# Altium PCB PCB_Copy of car.SchDoc_4_2023-05-25.pcbdoc
Units mil, origin at the board's own origin, x right, y up, seen from the top; angles counter-clockwise.
Board outline 3780 x 4178.39 mil, 2 copper layers (Top Layer, Bottom Layer); 31 components, 40 nets, 166 pads, 37 vias.
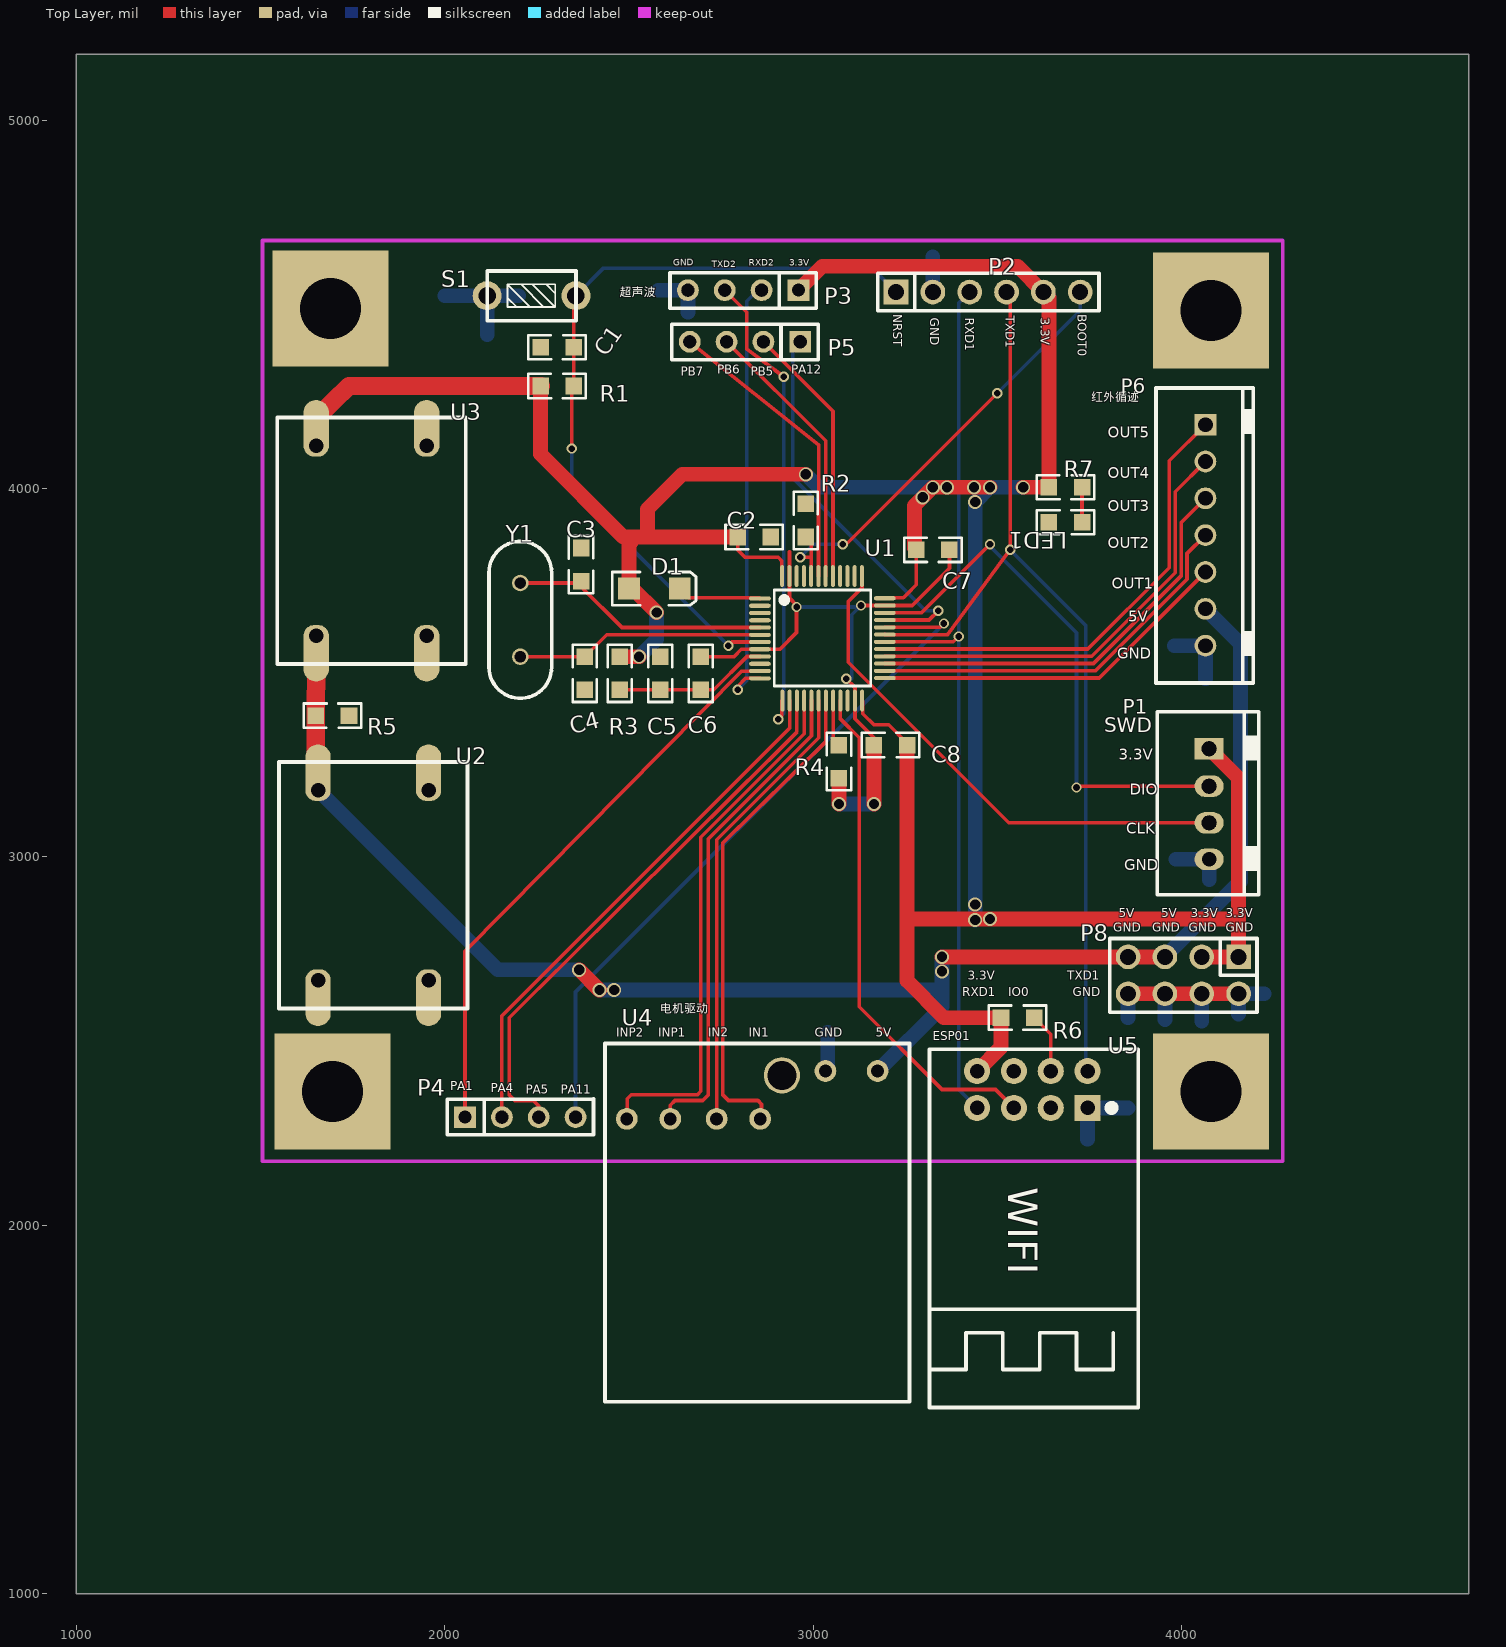
[diagram p0: Top Layer view]
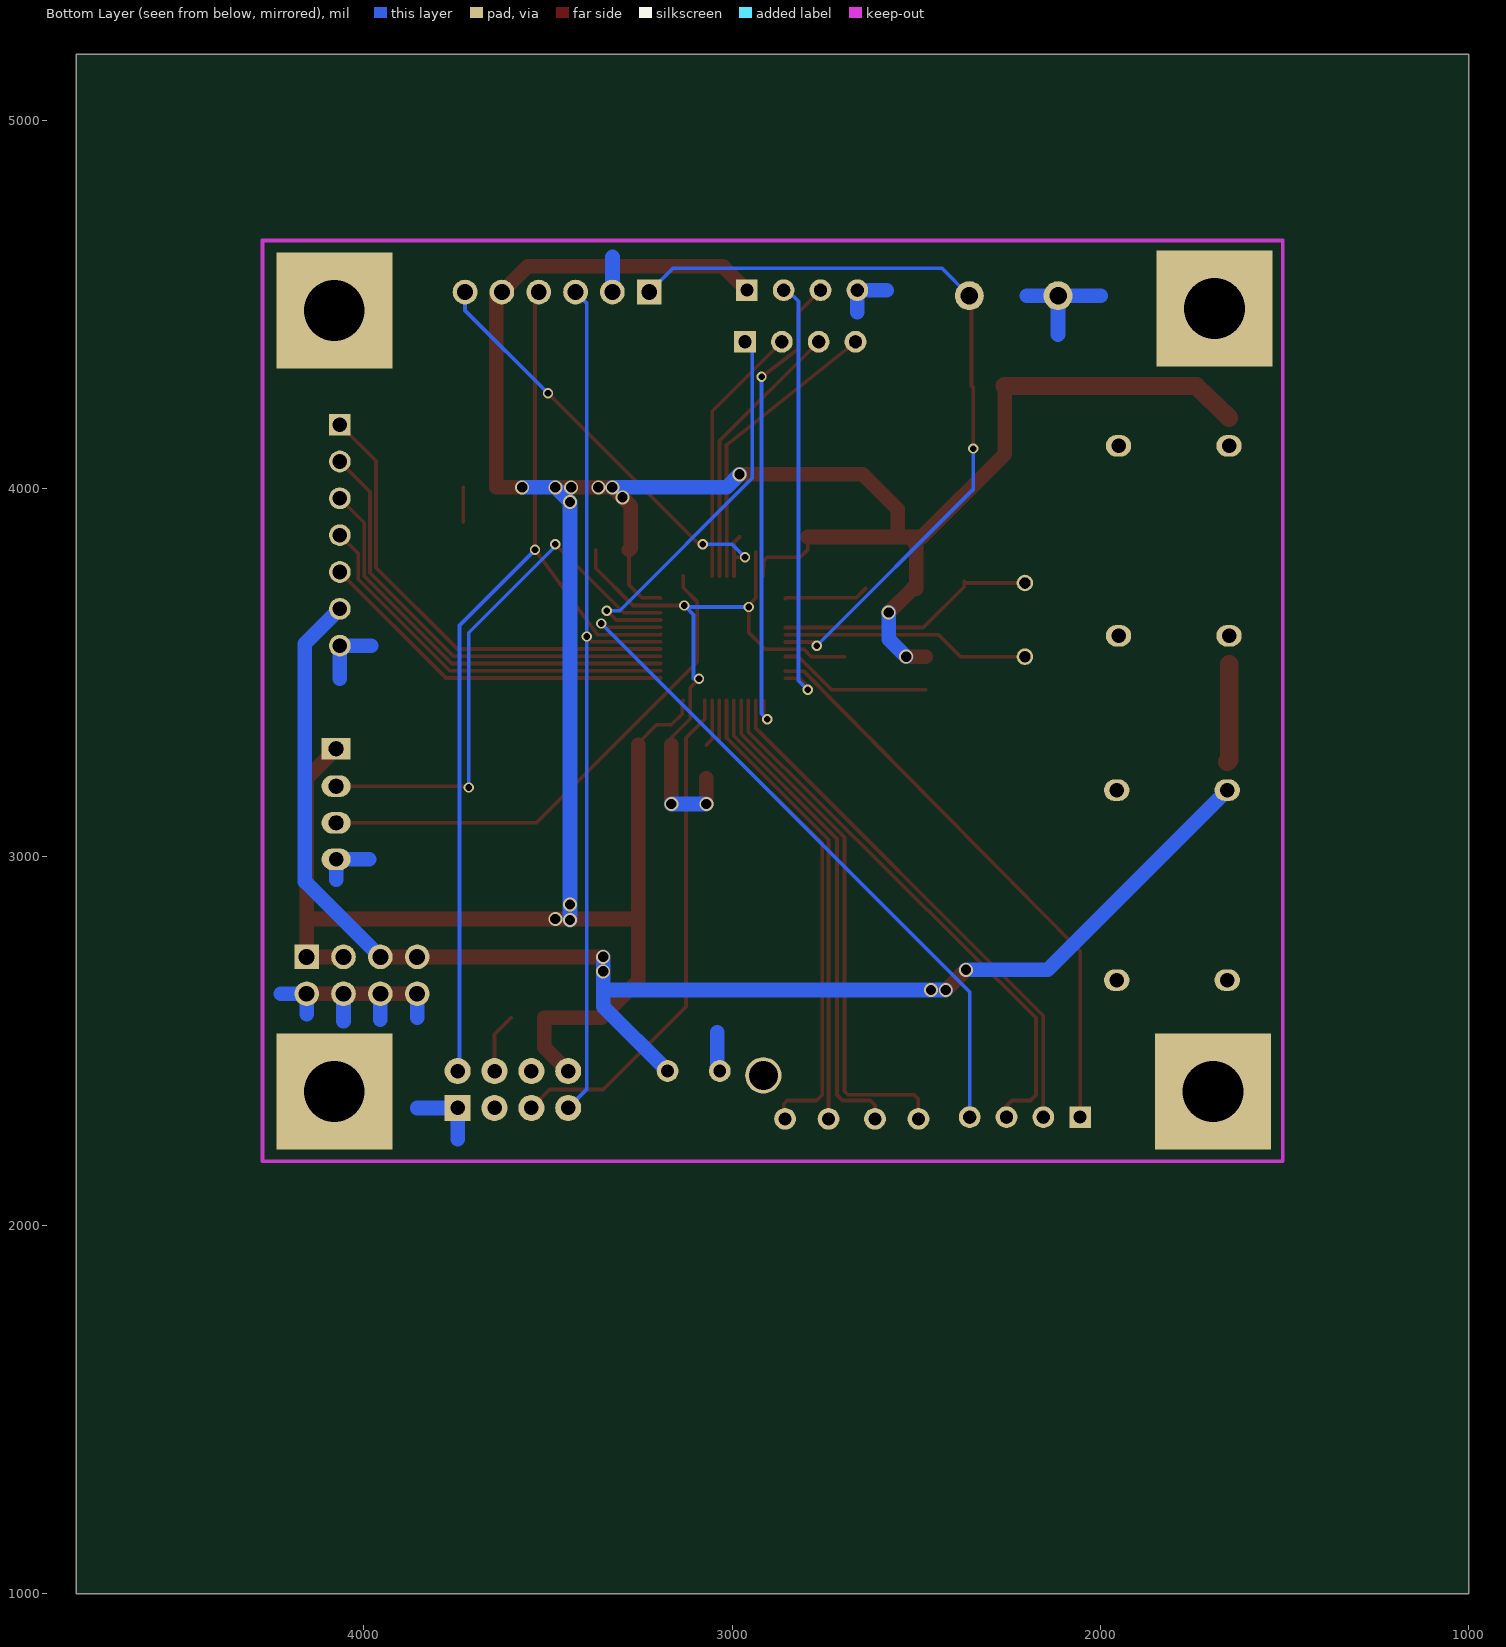
[diagram p1: Bottom Layer view, seen from below]

## Layer stack, top to bottom
Top Layer: signal copper (thickness not stored)
Dielectric: dielectric 12.6, FR-4, Dk 4.8
Bottom Layer: signal copper (thickness not stored)

## Board outline
4780,1000 1000,1000 1000,5178.39 4780,5178.39

## Components (designator, comment, footprint, x,y, rotation, side; value= is the part's Value field where it differs from the comment)
C1 "104" 0805 2260,4383.39 r0 top
C2 "104" 0805 2795,3868.39 r0 top
C3 "22P" 0805 2370,3838.39 r270 top
C4 "22P" 0805 2380,3453.39 r90 top
C5 "10uF" 0805 2585,3453.39 r90 top
C6 "104" 0805 2695,3453.39 r90 top
C7 "104" 0805 3280,3833.39 r0 top
C8 "104" 0805 3255,3303.39 r180 top
D1 "1N4148" "______ __Ƭ IN4148" 2500,3728.39 r0 top
LED1 "FC-2012UGK-520D5" 0805 3730,3908.39 r180 top
P1 "XH2.54-4" VH2.54_4 4075,3293.39 r90 top
P2 "2.54-1*6" HDR-TH_6P-P2.54-V-M 3475,4533.39 r0 top
P3 "2.54 1*4" "___Ų___ 2.54 1*4" 2960,4538.39 r180 top
P4 "2.54 1*4" "___Ų___ 2.54 1*4" 2055,2293.39 r0 top
P5 "2.54 1*4" "___Ų___ 2.54 1*4" 2965,4398.39 r180 top
P6 "XH2.54-7" VH2.54_7 4065,4173.39 r90 top
P8 "PZ254V-12-8P" HDR-TH_8P-P2.54-V-M-R2-C4-S2.54 4005,2678.39 r180 top
R1 "10K" 0805 2260,4278.39 r0 top
R2 "100K" 0805 2980,3958.39 r270 top
R3 "10R" 0805 2475,3543.39 r270 top
R4 "100K" 0805 3070,3213.39 r90 top
R5 "10K" 0805 1740,3383.39 r180 top
R6 "1K" 0805 3510,2563.39 r0 top
R7 "4.7K" 0805 3640,4003.39 r0 top
S1 "key" "____ _ᴥ  6*3" 2115,4523.39 r90 top
U1 "stm32f103c6t6" LQFP-48_48P-L7.0-W7.0-P0.50-LS9.0-BL 3025,3593.39 r270 top
U2 "5V降压模块" MOTOR-DRIVE 1550,2588.39 r90 top
U3 "3.3V降压模块" MOTOR-DRIVE 1545,3523.39 r90 top
U4 "电机驱动" DIRVE_MOTOR 2435,2493.39 r270 top
U5 "2.4GHz" WIFIM-TH_8P-L24.7-W14.4-P2.54 3595,2368.39 r270 top
Y1 "8M" "____ BCY-W2/E4.7" 2205,3543.39 r90 top

## Footprints (in the part's own frame and the unit in brackets; to place one, negate y for a bottom-side part, rotate by r counter-clockwise, add the part's x,y. Pads: shape width x height; smd on the part's side, far side on the other; paste and mask are expansions set on the pad)
0805 [mil]
  rect 45x45 smd paste+0 mask+2: 1(0,0) 2(90,0)
  silkscreen extent -33,-33 123,33
"____ _ᴥ  6*3" [mm]
  round 2 hole 1.2 paste+0 mask+0.051: 1(0,0) 2(0,-6.121)
  silkscreen extent -1.73,-6.12 1.7,0
"____ BCY-W2/E4.7" [mil]
  round 45 hole 30 slot 30.2 at 0 deg paste+0 mask+2: 1(0,0) 2(200,0)
  silkscreen extent -113,-85 313,85
"______ __Ƭ IN4148" [mm]
  rect 1.5x1.5 smd paste+0 mask+0.051: 1(0,0) 2(3.5,0)
  silkscreen extent -1.15,-1.15 4.62,1.15
"___Ų___ 2.54 1*4" [mm]
  rect 1.5x1.5 hole 0.9 paste+0 mask+0.051: 1(0,0)
  round 1.5 hole 0.889 slot 0.894 at 90 deg paste+0 mask+0.051: 2(2.54,0) 3(5.08,0) 4(7.62,0)
  silkscreen extent -1.23,-1.21 8.85,1.25
DIRVE_MOTOR [mm]
  round 1.5 hole 0.889 paste+0 mask+0.051: 1(1.9,18.8) 2(1.9,15.2) 3(5.2,10.7) 4(5.2,7.7) 5(5.2,4.5) 6(5.2,1.5)
  round 2.5 hole 2 paste+0 mask+0.051: ""(2.2,12.2)
  silkscreen extent 0,0 24.7,21
HDR-TH_6P-P2.54-V-M [mm]
  rect 1.7x1.7 hole 1.1 paste+0 mask+0.051: 1(-6.35,0)
  round 1.7 hole 1.1 paste+0 mask+0.051: 2(-3.81,0) 3(-1.27,0) 4(1.27,0) 5(3.81,0) 6(6.35,0)
  silkscreen extent -7.6,-1.3 7.65,1.3
HDR-TH_8P-P2.54-V-M-R2-C4-S2.54 [mm]
  rect 1.7x1.7 hole 1.1 paste+0 mask+0.051: 1(-3.81,-1.27)
  round 1.7 hole 1.1 paste+0 mask+0.051: 2(-3.81,1.27) 3(-1.27,-1.27) 4(-1.27,1.27) 5(1.27,-1.27) 6(1.27,1.27) 7(3.81,-1.27) 8(3.81,1.27)
  silkscreen extent -5.08,-2.54 5.08,2.54
LQFP-48_48P-L7.0-W7.0-P0.50-LS9.0-BL [mm]
  oval 0.28x1.5 smd paste+0 mask+0.051: 1(-2.743,-4.305) 2(-2.243,-4.305) 3(-1.742,-4.305) 4(-1.242,-4.305) 5(-0.742,-4.305) 6(-0.241,-4.305) 7(0.257,-4.305) 8(0.757,-4.305) 9(1.257,-4.305) 10(1.758,-4.305) 11(2.258,-4.305) 12(2.758,-4.305) 25(2.743,4.305) 26(2.243,4.305) 27(1.742,4.305) 28(1.242,4.305) 29(0.742,4.305) 30(0.241,4.305) 31(-0.257,4.305) 32(-0.757,4.305) 33(-1.257,4.305) 34(-1.758,4.305) 35(-2.258,4.305) 36(-2.758,4.305)
  oval 1.5x0.28 smd paste+0 mask+0.051: 13(4.293,-2.756) 14(4.293,-2.256) 15(4.293,-1.755) 16(4.293,-1.255) 17(4.293,-0.754) 18(4.293,-0.254) 19(4.293,0.244) 20(4.293,0.744) 21(4.293,1.245) 22(4.293,1.745) 23(4.293,2.245) 24(4.293,2.746) 37(-4.293,2.73) 38(-4.293,2.23) 39(-4.293,1.73) 40(-4.293,1.229) 41(-4.293,0.729) 42(-4.293,0.229) 43(-4.293,-0.269) 44(-4.293,-0.77) 45(-4.293,-1.27) 46(-4.293,-1.77) 47(-4.293,-2.271) 48(-4.293,-2.771)
  silkscreen extent -3.33,-3.31 3.3,3.34
MOTOR-DRIVE [mm]
  oval 2.42x1.75 smd paste+0: 1(0,-2.69) 2(0,-10.31) 3(17,-10.31) 4(17,-2.69)
  rect 1.95x1.75 smd paste+0: 1(0.975,-2.69) 2(0.975,-10.31) 3(16.025,-10.31) 4(16.025,-2.69)
  oval 1.5x1.75 hole 1 paste+0: 1(1.95,-2.69) 2(1.95,-10.31) 3(15.05,-10.31) 4(15.05,-2.69)
  silkscreen extent 0,-13 17,0
VH2.54_4 [mm]
  rect 1.5x2 hole 1.016 slot 1.021 at 90 deg paste+0 mask+0.051: 1(0,0)
  oval 1.5x2 hole 1.016 slot 1.021 at 90 deg paste+0 mask+0.051: 2(-2.58,0) 3(-5.105,0)
  oval 1.5x2 hole 1 paste+0 mask+0.051: 4(-7.62,0)
  silkscreen extent -10.06,-3.43 2.56,3.58
VH2.54_7 [mm]
  rect 1.5x1.5 hole 1.016 paste+0 mask+0.051: 1(0,0)
  round 1.5 hole 1.016 paste+0 mask+0.051: 2(-2.54,0) 3(-5.08,0) 4(-7.62,0) 5(-10.16,0) 6(-12.7,0) 7(-15.24,0)
  silkscreen extent -17.82,-3.3 2.53,3.4
WIFIM-TH_8P-L24.7-W14.4-P2.54 [mm]
  rect 1.8x1.8 hole 1 paste+0 mask+0.051: 1(1.27,3.81)
  round 1.8 hole 1 paste+0 mask+0.051: 2(1.27,1.27) 3(1.27,-1.27) 4(1.27,-3.81) 5(-1.27,3.81) 6(-1.27,1.27) 7(-1.27,-1.27) 8(-1.27,-3.81)
  silkscreen extent -2.77,-7.11 21.93,7.31

## Free pads (board coordinates)
  rect 314.96x314.96 hole 165.35 paste+0 mask+2: 0(1690,4488.39) 0(1695,2363.39) 0(4080,2363.39) 0(4080,4483.39)

## Via types
v1: diameter 38, hole 28, Top Layer to Bottom Layer, tented both sides, 20 vias
v2: diameter 28, hole 18, Top Layer to Bottom Layer, tented both sides, 17 vias

## Nets (pads, with @x,y where several pads share a name; then routed paths per layer and width w, separated by ;. In a path a pad name is that pad's centre, name@x,y a point inside that pad or via, vN(x,y) a via of type N, cw(c..) or ccw(c..) an arc to the next point about the centre after c; other vN are vias at no path point)
0: pad.0@1690,4488.39
1: pad.0@4080,4483.39
2: pad.0@4080,2363.39
3.3V: C2.1 C7.1 C8.1 D1.1 P1.1 P2.5 P3.1 P8.1 P8.3 R1.1 R3.1 R6.1 R7.1 U1.24 U1.36 U1.48 U3.4 U5.8 | length 9182.6
  Top Layer w10: C2.1 2795,3833.39 2815,3813.39 2905,3813.39 2915,3803.39 U1.48 ; U1.24 3135,3422.49 3135,3388.39 3165,3358.39 3205,3358.39 3255,3308.38 C8.1 ; U1.36 3195.9,3703.39 3245,3703.39 3255.2,3713.59 3280,3738.39 C7.1
  Top Layer w40: R1.1 2260,4093.39 2485,3868.39 2550,3868.39 ; R3.1 v1(2527.4,3543.39) ; 2505.4,3868.39 2505.4,3853.79 2500,3848.39 D1.1 2510,3728.39 v1(2575,3663.39) ; C2.1 2550,3868.39 ; P3.1 3025,4603.39 3555,4603.39 P2.5 3640,4518.39 R7.1 v1(3570,4003.39) ; v1(2980,4038.39) 2645,4038.39 2550,3943.39 2550,3868.39 ; 3255,2831.33 v1(3480.02,2831.33) 4151.3,2831.33 4155,2835.03 ; C8.1 3255,2663.39 3355,2563.39 R6.1 3510,2483.38 U5.8 ; v1(3480,4003.39) v1(3436.76,4003.39) v1(3363.29,4003.39) v1(3325,4003.39) v1(3297.53,3975.92) 3275,3953.39 ; P8.3 P8.1 4155,3213.39 P1.1 ; C7.1@3275,3838.38 C7.1 C7.1@3275,3838.39 ; C7.1@3275,3838.38 3275,3953.39 ; C7.1@3275,3838.39 3275,3953.39
  Top Layer w50: U3.4@1651,4192.39 1740,4278.39 1765,4278.39 R1.1
  Bottom Layer w40: v1(2527.4,3543.39) 2575,3590.99 v1(2575,3663.39) ; v1(2980,4038.39) 3015,4003.39 v1(3325,4003.39) ; v1(3440,2828.39) v1(3440,2870.48) v1(3440,3963.39) v1(3480,4003.39) v1(3570,4003.39)
4: pad.0@1695,2363.39
5V: P6.6 P8.5 P8.7 R5.2 U2.4 U3.1 U4.1 | length 4247
  Top Layer w40: v1(2365,2693.39) v1(2420,2638.39) ; v1(3350,2728.39) P8.7 P8.5
  Top Layer w50: U3.1@1650.9,3523.39 R5.2 1650,3263.59 U2.4@1655.91,3257.68
  Bottom Layer w40: U2.4@1655.91,3180.91 2143.43,2693.39 v1(2365,2693.39) ; v1(2420,2638.39) v1(2460,2638.39) 3341.36,2638.39 3350,2647.03 ; U4.1 3350,2593.43 v1(3350,2689.15) v1(3350,2728.39) ; P8.5 4160,2933.39 4160,3578.39 P6.6
BOOT0: P2.6 R2.2 U1.44 | length 1230.4
  Top Layer w10: v2(2965,3813.39) 2992.05,3813.39 2994.7,3816.03 ; R2.2 2994.7,3853.69 U1.44 ; v2(3080,3848.39) 3090,3848.39 v2(3500,4258.39)
  Bottom Layer w10: v2(2965,3813.39) 3000,3848.39 v2(3080,3848.39) ; v2(3500,4258.39) 3725,4483.39 P2.6
ESP_IO0: U1.21 U5.3 | length 1386
  Top Layer w10: U1.21 3074,3374.39 3125,3323.39 3125,2593.39 3350,2368.39 3495,2368.39 U5.3
GND: C1.1 C2.2 C3.1 C4.1 C5.2 C6.2 C7.2 C8.2 LED1.2 P1.4 P2.2 P3.4 P6.7 P8.2 P8.4 P8.6 P8.8 R2.1 R4.1 R5.1 S1.1 U1.8 U1.23 U1.35 U1.47 U2.2 U2.3 U3.2 U3.3 U4.2 U5.1 | length 3581
  Top Layer w10: C6.2 2785,3543.39 2805,3563.39 U1.8@2855.5,3563.39 ; U1.8 2909.8,3563.59 2955,3608.79 2955,3683.39 2935.6,3702.79 U1.47 2935.6,3828.39 ; v2(3090,3483.39) 3113.4,3459.99 U1.23 3113.4,3374.99 3165,3323.38 C8.2 ; v2(3130,3682.29) U1.35 3268.9,3682.29 3370,3783.38 C7.2
  Top Layer w40: v1(3070,3143.39) R4.1 ; v1(3165,3143.39) C8.2 ; P8.8 P8.6 P8.4 P8.2
  Bottom Layer w10: v2(2955,3678.39) 3126.1,3678.39 v2(3130,3682.29) 3105,3657.29 3105,3483.39 v2(3090,3483.39)
  Bottom Layer w40: 2000,4523.39 S1.1 ; 2115,4418.39 S1.1 ; 2200,4523.39 S1.1 ; 2580,4538.39 P3.4 2660,4478.39 ; U4.2 3040,2425.17 3040,2523.39 ; v1(3070,3143.39) v1(3165,3143.39) ; P2.2 3325,4628.39 ; 3745,2233.39 U5.1 3855,2318.39 ; 3855,2563.39 P8.8 ; 3955,2558.39 P8.6 ; 3980,3573.39 P6.7 4065,3483.39 ; 3985,2993.39 P1.4 4075,2938.39 ; 4055,2553.39 P8.4 ; 4155,2573.39 P8.2 4225,2628.39
IN1: U1.19 U4.3 | length 1353.8
  Top Layer w10: U4.3@2850,2294.93 U4.3 2860,2292.41 2860,2328.39 2850,2338.39 2770,2338.39 2755,2353.39 2755,3038.39 3034.6,3312.99 U1.19
IN2: U1.18 U4.4 | length 1250.4
  Top Layer w10: U4.4@2738.15,2288.67 2738.15,3046.54 3015,3323.39 U1.18
INP3: U1.17 U4.5 | length 1338.4
  Top Layer w10: U4.5 2612.16,2325.55 2625,2338.39 2700,2338.39 2715,2353.39 2715,3048.39 2995.3,3328.69 U1.17
INP4: U1.16 U4.6 | length 1440.2
  Top Layer w10: U4.6@2494,2288.69 2495,2343.39 2506.1,2354.49 2686.1,2354.49 2695,2363.39 2695,3053.39 2975.6,3333.99 U1.16
LED1_1: LED1.1 R7.2 | length 95
  Top Layer w10: LED1.1 R7.2
NRST: C1.2 P2.1 R1.2 S1.2 U1.7 | length 2147.2
  Top Layer w10: v2(2345,4108.39) 2345,4273.39 R1.2 C1.2 2350,4517.39 S1.2 ; v2(2770,3573.39) 2779.9,3583.29 U1.7
  Bottom Layer w10: v2(2345,4108.39) 2345,3998.39 v2(2770,3573.39) ; S1.2 2431,4598.39 3160,4598.39 P2.1
OUT1: P6.5 U1.25 | length 989.8
  Top Layer w10: U1.25 3777,3485.39 P6.5
OUT2: P6.4 U1.26 | length 1064.1
  Top Layer w10: U1.26 3766.7,3505.09 4015,3753.39 4015,3823.39 P6.4
OUT3: P6.3 U1.27 | length 1141.3
  Top Layer w10: U1.27 3761.4,3524.79 3998.93,3762.32 3998.93,3907.32 P6.3
OUT4: P6.2 U1.28 | length 1218.5
  Top Layer w10: U1.28 3756.1,3544.49 3982.86,3771.25 3982.86,3991.25 P6.2
OUT5: P6.1 U1.29 | length 1292.7
  Top Layer w10: U1.29 3745.8,3564.19 3966.79,3785.18 3966.79,4075.18 P6.1
PA1: P4.1 U1.11 | length 1568.3
  Top Layer w10: P4.1 2055,2743.39 2805,3503.39 U1.11
PA4: P4.2 U1.14 | length 1454.6
  Top Layer w10: P4.2 2155,2568.39 2936.2,3349.59 U1.14
PA5: P4.3 U1.15 | length 1518.4
  Top Layer w10: P4.3 2255,2323.39 2240,2338.39 2190,2338.39 2175,2353.39 2175,2563.39 2955.9,3339.29 U1.15
PA11: P4.4 U1.32 | length 1918.9
  Top Layer w10: U1.32 3344.8,3623.19 v2(3355,3633.39)
  Bottom Layer w10: P4.4 2355,2633.39 v2(3355,3633.39)
PA12: P5.1 U1.33 | length 1090.2
  Top Layer w10: U1.33 3314.5,3642.89 v2(3340,3668.39)
  Bottom Layer w10: P5.1 2945,4398.39 2945,4028.39 3305,3668.39 v2(3340,3668.39)
PB5: P5.2 U1.41 | length 714.2
  Top Layer w10: P5.2 3053.7,4209.69 U1.41
PB6: P5.3 U1.42 | length 747.4
  Top Layer w10: P5.3 3034,4129.39 U1.42
PB7: P5.4 U1.43 | length 804.2
  Top Layer w10: P5.4 3015,4118.39 U1.43
SWCLK: P1.3 U1.37 | length 1410.1
  Top Layer w10: U1.37 3132.5,3730.89 3095,3693.39 3095,3528.39 3531,3092.39 P1.3
SWDIO: P1.2 U1.34 | length 1481.2
  Top Layer w10: U1.34 3294.2,3662.59 v2(3480,3848.39) ; v2(3715,3188.39) 3718.43,3191.82 P1.2
  Bottom Layer w10: v2(3480,3848.39) 3480,3843.39 3715,3608.39 v2(3715,3188.39)
U1_1: D1.2 U1.1 | length 228.9
  Top Layer w10: D1.2 2662.8,3703.39 2853.5,3703.39 U1.1
U1_5: C3.2 U1.5 Y1.2 | length 713.5
  Top Layer w10: Y1.2 2365,3743.39 C3.2 2370,3733.39 2480.8,3622.59 U1.5
U1_6: C4.2 U1.6 Y1.1 | length 675.1
  Top Layer w10: Y1.1 C4.2 2439.5,3602.89 U1.6
U1_9: C5.1 C6.1 R3.2 U1.9 | length 418
  Top Layer w10: R3.2 C5.1 C6.1 2730,3453.38 2820.5,3543.89 U1.9
U1_20: R4.2 U1.20 | length 127.5
  Top Layer w10: U1.20 3054.3,3319.08 R4.2
U1_RXD: P2.3 U1.30 U5.4 | length 2454.6
  Top Layer w10: U1.30 3380.5,3583.89 v2(3395,3598.39)
  Bottom Layer w10: P2.3 3395,4503.39 v2(3395,3598.39) 3395,2368.39 U5.4
U1_TXD: P2.4 U1.31 U5.5 | length 2665.6
  Top Layer w10: U1.31 3365,3603.39 v2(3535,3833.39) 3535,4523.39 P2.4
  Bottom Layer w10: v2(3535,3833.39) 3740,3628.39 3740,2418.39 U5.5
U2_RXD: P3.2 U1.12 | length 1197.1
  Top Layer w10: v2(2795,3453.39) 2795,3463.39 2816.4,3484.79 U1.12
  Bottom Layer w10: v2(2795,3453.39) 2820,3478.39 2820,4508.39 2850,4538.39 P3.2
U2_TXD: P3.3 U1.13 | length 1301.8
  Top Layer w10: P3.3 2820,4478.39 2820,4378.39 v2(2920,4303.39) ; v2(2905,3373.39) 2915,3383.39 2915,3422.89 U1.13
  Bottom Layer w10: v2(2905,3373.39) 2920,3388.39 v2(2920,4303.39)
U5_6: R6.2 U5.6 | length 163.6
  Top Layer w10: R6.2 3645,2518.38 U5.6
pads on no net: U1.2 U1.3 U1.4 U1.10 U1.22 U1.38 U1.39 U1.40 U1.45 U1.46 U2.1 U4. U5.2 U5.7

## Polygon pours and split planes (outlines as drawn)
GND on Bottom Layer (solid): 1505,4673.39 1505,2173.39 4275,2173.39 4275,4673.39
GND on Top Layer (solid): 4275,4673.39 4275,2173.39 1505,2173.39 1505,4673.39

## Other copper
Top Layer:
  pour cut-out net U1_6: 2155,3793.39 2155,3488.39 2250,3488.39 2255,3488.39 2255,3493.39 2255,3793.39
  pour cut-out net U1_6: 2070,4453.39 2050,4453.39 2050,4468.39 2050,4593.39 2170,4593.39 2170,4453.39 2070,4453.39
  pour cut-out net U1_6: 2320,4453.39 2300,4453.39 2300,4468.39 2300,4593.39 2420,4593.39 2420,4453.39 2320,4453.39
  pour cut-out net U1_6: 2640,4348.39 2620,4348.39 2620,4363.39 2620,4443.39 3015,4443.39 3015,4348.39 2640,4348.39
  pour cut-out net U1_6: 2625,4493.39 2605,4493.39 2605,4508.39 2605,4588.39 3005,4588.39 3005,4493.39 2625,4493.39
  pour cut-out net U1_6: 3195.93,4482.25 3175.93,4482.25 3175.93,4497.25 3175,4583.39 3775,4583.39 3775,4483.39 3195.93,4482.25
  pour cut-out net U1_6: 4025,3528.39 4005,3528.39 4005,3543.39 4000,4223.39 4130,4223.39 4125,3528.39 4025,3528.39
  pour cut-out net U1_6: 4035,2943.39 4015,2943.39 4015,2958.39 4010,3348.39 4135,3348.39 4135,2943.39 4035,2943.39
  pour cut-out net U1_6: 3825,2578.39 3805,2578.39 3805,2593.39 3805,2773.39 4205,2773.39 4205,2578.39 3825,2578.39
  pour cut-out net U1_6: 3390,2248.39 3370,2248.39 3370,2263.39 3365,2473.39 3820,2478.39 3820,2248.39 3390,2248.39
  pour cut-out net U1_6: 2455,2218.39 2435,2218.39 2435,2233.39 2435,2488.39 3260,2493.39 3260,2213.39 2455,2218.39
  pour cut-out net U1_6: 2027.19,2247.29 2007.19,2247.29 2007.19,2262.29 2005,2338.39 2400,2338.39 2405,2248.39 2027.19,2247.29
  pour cut-out net U1_6: 2867.5,3783.39 2867.5,3398.39 3247.5,3393.39 3252.5,3393.39 3252.5,3398.39 3262.5,3783.39
Bottom Layer:
  pour cut-out net U1_6: 2830,3723.39 2830,3418.39 2925,3418.39 2930,3418.39 2930,3423.39 2930,3723.39
  pour cut-out net U1_6: 2304.75,4048.63 2304.75,3743.63 2399.75,3743.63 2404.75,3743.63 2404.75,3748.63 2404.75,4048.63
  pour cut-out net U1_6: 2155,3793.39 2155,3488.39 2250,3488.39 2255,3488.39 2255,3493.39 2255,3793.39
  pour cut-out net U1_6: 2155,3793.39 2155,3488.39 2250,3488.39 2255,3488.39 2255,3493.39 2255,3793.39
  pour cut-out net U1_6: 2070,4453.39 2050,4453.39 2050,4468.39 2050,4593.39 2170,4593.39 2170,4453.39 2070,4453.39
  pour cut-out net U1_6: 2320,4453.39 2300,4453.39 2300,4468.39 2300,4593.39 2420,4593.39 2420,4453.39 2320,4453.39
  pour cut-out net U1_6: 2640,4348.39 2620,4348.39 2620,4363.39 2620,4443.39 3015,4443.39 3015,4348.39 2640,4348.39
  pour cut-out net U1_6: 2630,4488.39 2610,4488.39 2610,4503.39 2610,4583.39 3010,4583.39 3010,4488.39 2630,4488.39
  pour cut-out net U1_6: 3195.93,4482.25 3175.93,4482.25 3175.93,4497.25 3175,4583.39 3775,4583.39 3775,4483.39 3195.93,4482.25
  pour cut-out net U1_6: 4025,3528.39 4005,3528.39 4005,3543.39 4000,4223.39 4130,4223.39 4125,3528.39 4025,3528.39
  pour cut-out net U1_6: 4035,2943.39 4015,2943.39 4015,2958.39 4010,3348.39 4135,3348.39 4135,2943.39 4035,2943.39
  pour cut-out net U1_6: 3825,2578.39 3805,2578.39 3805,2593.39 3805,2773.39 4205,2773.39 4205,2578.39 3825,2578.39
  pour cut-out net U1_6: 3390,2248.39 3370,2248.39 3370,2263.39 3365,2473.39 3820,2478.39 3820,2248.39 3390,2248.39
  pour cut-out net U1_6: 2455,2218.39 2435,2218.39 2435,2233.39 2435,2488.39 3260,2493.39 3260,2213.39 2455,2218.39
  pour cut-out net U1_6: 2027.19,2247.29 2007.19,2247.29 2007.19,2262.29 2005,2338.39 2400,2338.39 2405,2248.39 2027.19,2247.29
  pour cut-out net U1_6: 2027.19,2247.29 2007.19,2247.29 2007.19,2262.29 2005,2338.39 2400,2338.39 2405,2248.39 2027.19,2247.29
  pour cut-out net U1_6: 2455,2218.39 2435,2218.39 2435,2233.39 2435,2488.39 3260,2493.39 3260,2213.39 2455,2218.39
  pour cut-out net U1_6: 3390,2248.39 3370,2248.39 3370,2263.39 3365,2473.39 3820,2478.39 3820,2248.39 3390,2248.39
  pour cut-out net U1_6: 3825,2578.39 3805,2578.39 3805,2593.39 3805,2773.39 4205,2773.39 4205,2578.39 3825,2578.39
  pour cut-out net U1_6: 4035,2943.39 4015,2943.39 4015,2958.39 4010,3348.39 4135,3348.39 4135,2943.39 4035,2943.39
  pour cut-out net U1_6: 4025,3528.39 4005,3528.39 4005,3543.39 4000,4223.39 4130,4223.39 4125,3528.39 4025,3528.39
  pour cut-out net U1_6: 3195.93,4482.25 3175.93,4482.25 3175.93,4497.25 3175,4583.39 3775,4583.39 3775,4483.39 3195.93,4482.25
  pour cut-out net U1_6: 2640,4348.39 2620,4348.39 2620,4363.39 2620,4443.39 3015,4443.39 3015,4348.39 2640,4348.39
  pour cut-out net U1_6: 2630,4488.39 2610,4488.39 2610,4503.39 2610,4583.39 3010,4583.39 3010,4488.39 2630,4488.39
  pour cut-out net U1_6: 2320,4453.39 2300,4453.39 2300,4468.39 2300,4593.39 2420,4593.39 2420,4453.39 2320,4453.39
  pour cut-out net U1_6: 2070,4453.39 2050,4453.39 2050,4468.39 2050,4593.39 2170,4593.39 2170,4453.39 2070,4453.39
  pour cut-out net U1_6: 2155,3793.39 2155,3488.39 2250,3488.39 2255,3488.39 2255,3493.39 2255,3793.39

## Silkscreen, mask and mechanical layers (free items; w line width, h text height)
Top Overlay:
  text "GND" at 2620,4598.39 h30 r1
  text "RXD2" at 2825,4598.39 h30
  text "3.3V" at 2935,4598.39 h30
  text "TXD2" at 2725,4593.39 h30
  text "超声波" at 2475,4513.39 h40
  text "NRST" at 3210,4473.39 h40 r270
  text "BOOT0" at 3710,4473.39 h40 r270
  text "TXD1" at 3515,4468.39 h40 r270
  text "GND" at 3310,4463.39 h40 r270
  text "RXD1" at 3405,4463.39 h40 r270
  text "3.3V" at 3610,4463.39 h40 r270
  text "PB6" at 2740,4303.39 h40
  text "PA12" at 2940,4303.39 h40
  text "PB7" at 2640,4298.39 h40
  text "PB5" at 2830,4298.39 h40
  text "红外循迹" at 3755,4228.39 h40
  text "OUT5" at 3800,4138.39 h30
  text "OUT4" at 3800,4028.39 h30
  text "OUT3" at 3800,3938.39 h30
  text "OUT2" at 3800,3838.39 h30
  text "OUT1" at 3810,3728.39 h30
  text "5V" at 3855,3638.39 h30
  text "GND" at 3825,3538.39 h30
  text "SWD" at 3790,3338.39 h40
  text "3.3V" at 3830,3263.39 h30
  text "DIO" at 3860,3168.39 h30
  text "CLK" at 3850,3063.39 h30
  text "GND" at 3845,2963.39 h30
  text "5V" at 3830,2828.39 h40
  text "5V" at 3945,2828.39 h40
  text "3.3V" at 4025,2828.39 h40
  text "3.3V" at 4120,2828.39 h40
  text "GND" at 3815,2788.39 h40
  text "GND" at 3920,2788.39 h40
  text "GND" at 4020,2788.39 h40
  text "GND" at 4120,2788.39 h40
  text "3.3V" at 3420,2658.39 h40
  text "TXD1" at 3690,2658.39 h40
  text "RXD1" at 3405,2613.39 h40
  text "IO0" at 3530,2613.39 h40
  text "GND" at 3705,2613.39 h40
  text "电机驱动" at 2585,2568.39 h40
  text "INP2" at 2465,2503.39 h40
  text "INP1" at 2580,2503.39 h40
  text "IN2" at 2715,2503.39 h40 r1
  text "IN1" at 2825,2503.39 h40
  text "GND" at 3005,2503.39 h40
  text "5V" at 3170,2503.39 h40
  text "ESP01" at 3325,2493.39 h40
  text "PA1" at 2015,2358.39 h40
  text "PA4" at 2125,2353.39 h40
  text "PA5" at 2220,2348.39 h40
  text "PA11" at 2315,2348.39 h40

## Text inside footprints (layer, text, board x,y; h text height)
U5: Top Overlay "WIFI" at 3530,2103.39 h80 r270